# Altium PCB NIXIEclockhis.PcbDoc (part 1 of 3)
Units mil, origin at the board's own origin, x right, y up, seen from the top; angles counter-clockwise.
Board outline 8475 x 2960 mil, 2 copper layers (Top Layer, Bottom Layer); 232 components, 292 nets, 854 pads, 247 vias.
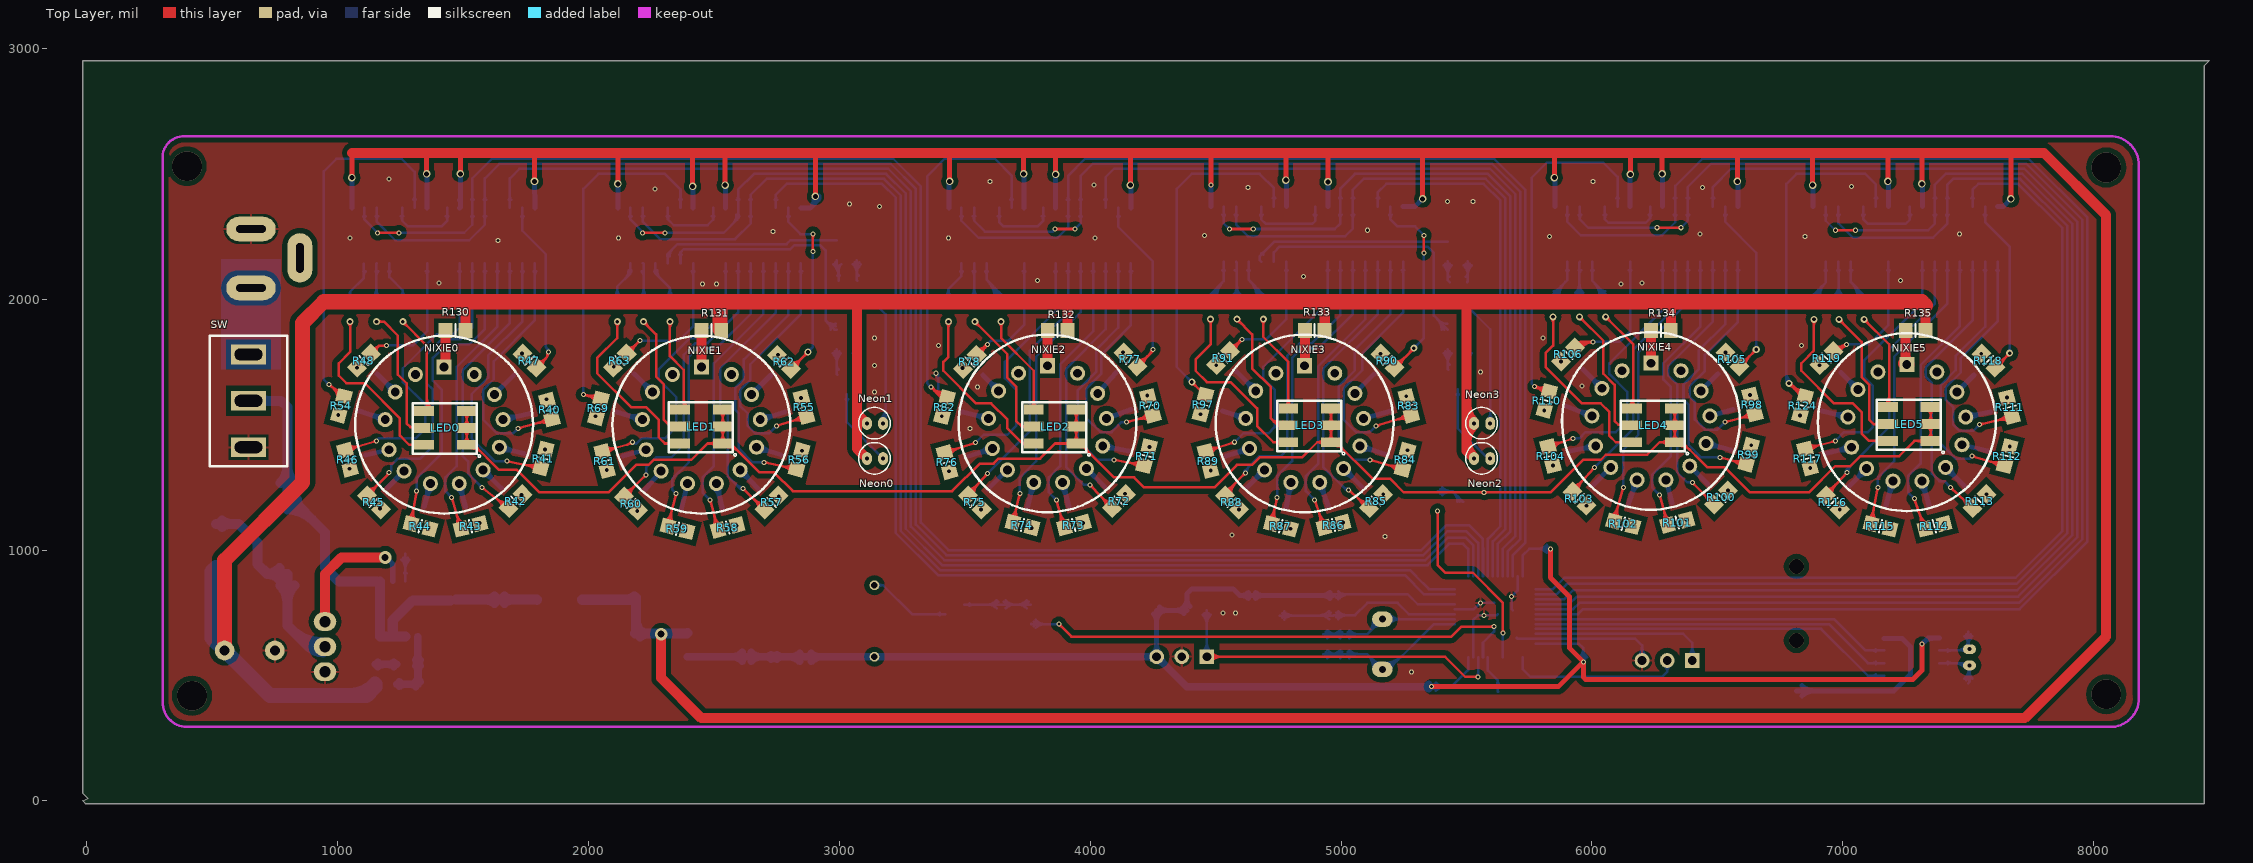
[diagram p0: Top Layer view]
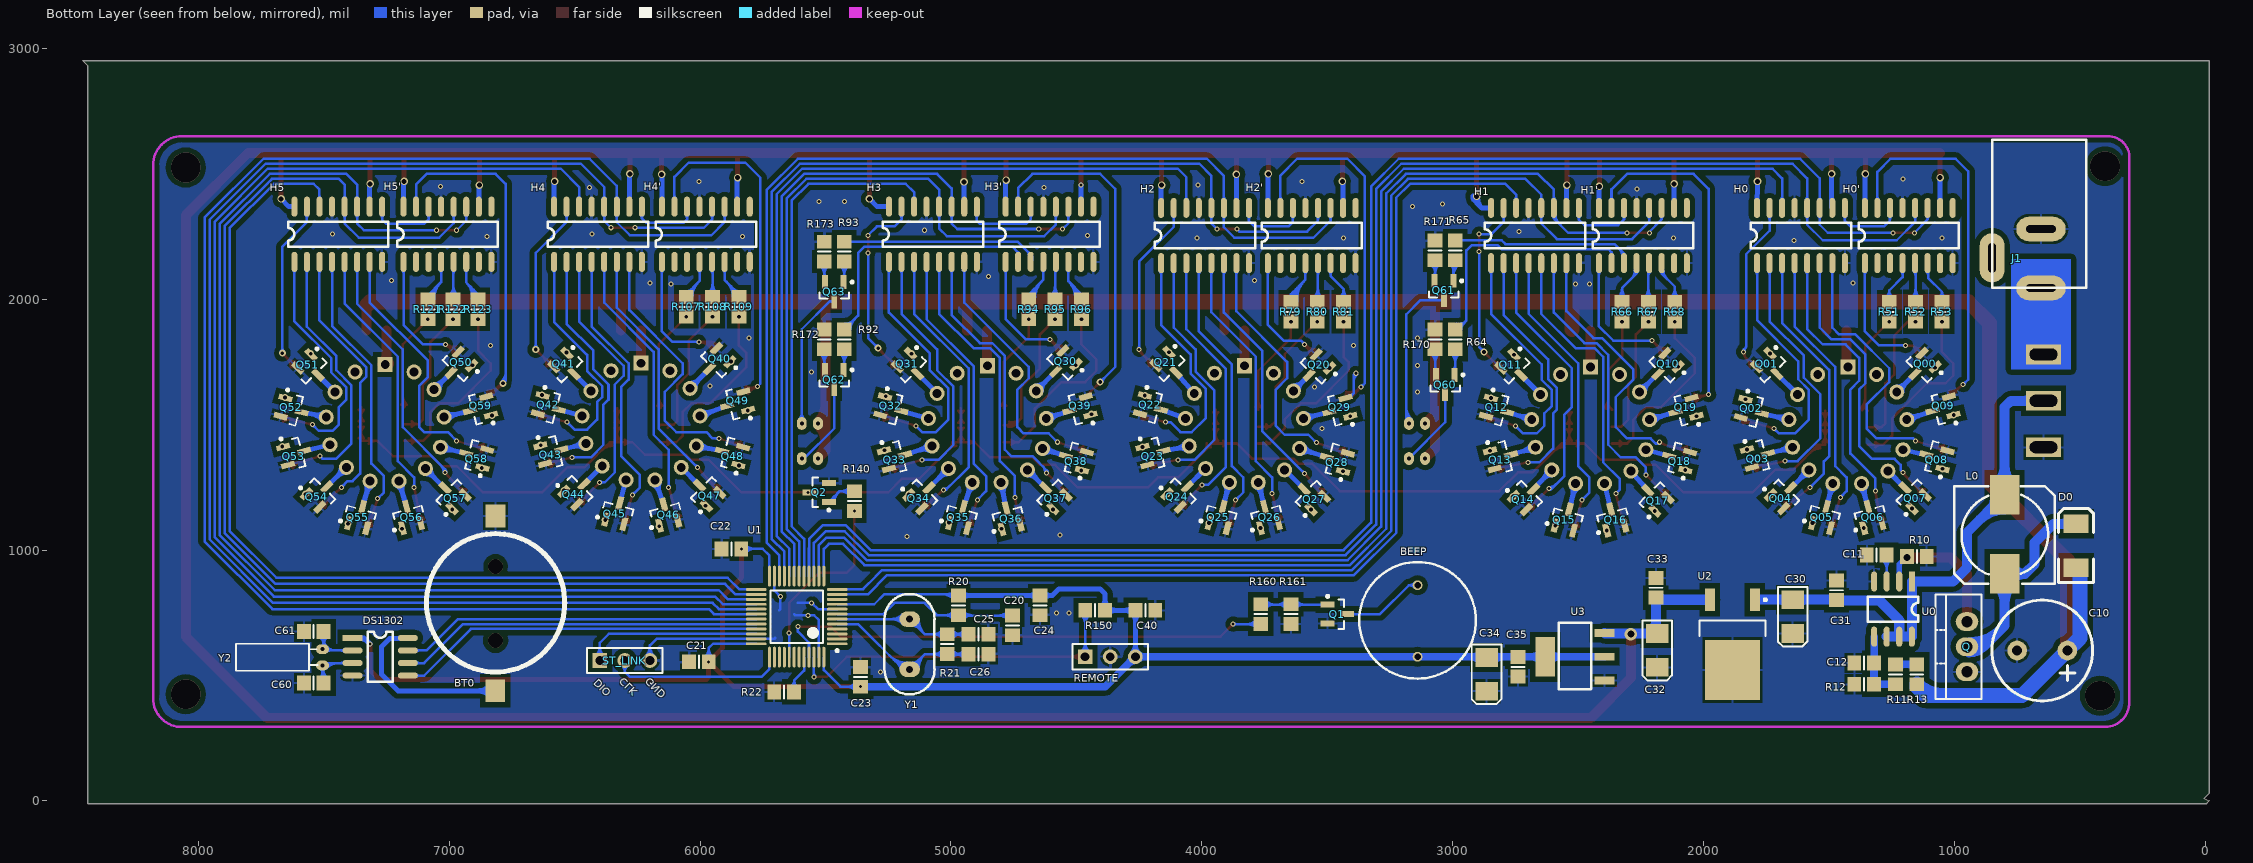
[diagram p1: Bottom Layer view, seen from below]

## Layer stack, top to bottom
Top Layer: signal copper 1.4
Dielectric: dielectric 12.6, FR-4, Dk 4.8
Bottom Layer: signal copper 1.4

## Board outline
-15,0 -5,-10 8440,-10 8440,2930 8460,2950 -15,2950 -15,30 -5,20 5,10

## Design rules (kind name [scope] priority, off if disabled: settings)
Clearance [All] p1: gap=7
ComponentClearance [All] p1: gap=0 collisioncheckmode=3 verticalgap=0 showdistances=FALSE
HoleSize [All] p1: absolutevalues=TRUE maxlimit=200 minlimit=1 maxpercent=80.000 minpercent=20.000
NetAntennae [All] p1: netantennaetolerance=10
PolygonConnect [All] p1: connectstyle=Relief reliefconductorwidth=10 reliefentries=4 polygonreliefangle="90 Angle" airgapwidth=10
RoutingVias [All] p1: holewidth=15 width=30 viastyle="Through Hole" minholewidth=10 minwidth=20 maxholewidth=28 maxwidth=50
SilkToSilkClearance [All] p1: silktosilkclearance=0
SilkToSolderMaskClearance [IsPad] p1: minsilkscreentomaskgap=0 clearancetoexposedcopper=TRUE
SolderMaskExpansion [All] p1: expansion=4
Width [All] p1: maxlimit=100 minlimit=10 preferedwidth=10
23 further rules are at their usual default settings.

## Components (designator, comment, footprint, x,y, rotation, side; value= is the part's Value field where it differs from the comment)
BEEP "Speaker" didi 3140,720 r90 bottom
BT0 "Battery" CR1220 6815,640 r90 bottom
C10 "250V" 1000UF 550,600 r0 bottom
C11 "Cap" 0805_M 1310,980 r0 bottom
C12 "Cap" 0805_M 1360,550 r180 bottom
C20 "Cap Semi" 0805_M 4755,700 r90 bottom
C21 "Cap Semi" 0805_M 6005,555 r180 bottom
C22 "Cap Semi" 0805_M 5875,1005 r180 bottom
C23 "Cap Semi" 0805_M 5360,495 r270 bottom
C24 "Cap Semi" 0805_M 4645,780 r90 bottom
C25 "CAP" 0805_M 4890,665 r0 bottom
C26 "CAP" 0805_M 4890,585 r0 bottom
C30 "Cap Pol1" 3528 1645,735 r270 bottom
C31 "104" 0805_M 1470,840 r270 bottom
C32 "Cap Pol1" 3528 2185,600 r270 bottom
C33 "Cap Semi" 0805_M 2190,850 r270 bottom
C34 "Cap Pol1" 3528 2865,505 r270 bottom
C35 "Cap Semi" 0805_M 2740,535 r90 bottom
C40 "Cap" 0805_M 4225,760 r0 bottom
C60 "Cap" 0805_M 7540,470 r0 bottom
C61 "Cap" 0805_M 7540,675 r0 bottom
D0 "SS14" 7227 515,930 r90 bottom
DS1302 "DS1302" SO-8 7385,650 r180 bottom
H0 "74HC595" SO-16 1615,2130 r90 bottom
H0' "74HC595" SO-16 1185,2130 r90 bottom
H1 "74HC595" SO-16 2675,2130 r90 bottom
H1' "74HC595" SO-16 2245,2130 r90 bottom
H2 "74HC595" SO-16 3990,2130 r90 bottom
H2' "74HC595" SO-16 3565,2130 r90 bottom
H3 "74HC595" SO-16 5075,2135 r90 bottom
H3' "74HC595" SO-16 4610,2135 r90 bottom
H4 "74HC595" SO-16 6410,2135 r90 bottom
H4' "74HC595" SO-16 5980,2135 r90 bottom
H5 "74HC595" SO-16 7445,2135 r90 bottom
H5' "74HC595" SO-16 7010,2135 r90 bottom
J1 "JK" POWER 475,2635 r0 bottom
L0 "L" L101 795,1055 r90 bottom
LED0 "LED.RGB" 5050LED 1335,1385 r0 top
LED1 "LED.RGB" 5050LED 2355,1390 r0 top
LED2 "LED.RGB" 5050LED 3765,1390 r0 top
LED3 "LED.RGB" 5050LED 4780,1395 r0 top
LED4 "LED.RGB" 5050LED 6150,1395 r0 top
LED5 "LED.RGB" 5050LED 7170,1400 r0 top
Neon0 "Neon" NEON 3110,1365 r270 top
Neon1 "Neon" NEON 3110,1505 r270 top
Neon2 "Neon" NEON 5530,1365 r270 top
Neon3 "Neon" NEON 5530,1505 r270 top
NIXIE0 "IN14" IN14 1425,1495 r0 top
NIXIE1 "IN14" IN14 2450,1495 r0 top
NIXIE2 "IN14" IN14 3830,1500 r0 top
NIXIE3 "IN14" IN14 4855,1500 r0 top
NIXIE4 "IN14" IN14 6235,1510 r0 top
NIXIE5 "IN14" IN14 7255,1505 r0 top
Q "IRF630" TO-220 950,615 r90 bottom
Q00 "A42" A42 1130,1730 r315 bottom
Q1 "QNPN" A42 3460,745 r180 bottom
Q01 "A42" A42 1735,1730 r225 bottom
Q2 "QNPN" A42 5525,1230 r0 bottom
Q02 "A42" A42 1805,1555 r195 bottom
Q03 "A42" A42 1780,1375 r165 bottom
Q04 "A42" A42 1680,1220 r135 bottom
Q05 "A42" A42 1520,1135 r105 bottom
Q06 "A42" A42 1335,1135 r75 bottom
Q07 "A42" A42 1170,1220 r45 bottom
Q08 "A42" A42 1075,1370 r15 bottom
Q09 "A42" A42 1050,1565 r345 bottom
Q10 "A42" A42 2155,1730 r315 bottom
Q11 "A42" A42 2755,1725 r225 bottom
Q12 "A42" A42 2820,1560 r195 bottom
Q13 "A42" A42 2805,1370 r165 bottom
Q14 "A42" A42 2705,1215 r135 bottom
Q15 "A42" A42 2545,1125 r105 bottom
Q16 "A42" A42 2360,1125 r75 bottom
Q17 "A42" A42 2195,1210 r45 bottom
Q18 "A42" A42 2100,1365 r15 bottom
Q19 "A42" A42 2075,1560 r345 bottom
Q20 "A42" A42 3545,1725 r315 bottom
Q21 "A42" A42 4130,1735 r225 bottom
Q22 "A42" A42 4200,1570 r195 bottom
Q23 "A42" A42 4190,1385 r165 bottom
Q24 "A42" A42 4085,1225 r135 bottom
Q25 "A42" A42 3925,1135 r105 bottom
Q26 "A42" A42 3740,1135 r75 bottom
Q27 "A42" A42 3565,1215 r45 bottom
Q28 "A42" A42 3465,1360 r15 bottom
Q29 "A42" A42 3455,1560 r345 bottom
Q30 "A42" A42 4555,1740 r315 bottom
Q31 "A42" A42 5160,1730 r225 bottom
Q32 "A42" A42 5235,1565 r195 bottom
Q33 "A42" A42 5220,1370 r165 bottom
Q34 "A42" A42 5115,1220 r135 bottom
Q35 "A42" A42 4960,1135 r105 bottom
Q36 "A42" A42 4770,1130 r75 bottom
Q37 "A42" A42 4595,1220 r45 bottom
Q38 "A42" A42 4505,1365 r15 bottom
Q39 "A42" A42 4490,1565 r345 bottom
Q40 "A42" A42 5935,1750 r315 bottom
Q41 "A42" A42 6530,1730 r225 bottom
Q42 "A42" A42 6600,1570 r195 bottom
Q43 "A42" A42 6590,1390 r165 bottom
Q44 "A42" A42 6490,1235 r135 bottom
Q45 "A42" A42 6330,1150 r105 bottom
Q46 "A42" A42 6135,1145 r75 bottom
Q47 "A42" A42 5975,1230 r45 bottom
Q48 "A42" A42 5875,1385 r15 bottom
Q49 "A42" A42 5855,1585 r345 bottom
Q50 "A42" A42 6965,1735 r315 bottom
Q51 "A42" A42 7550,1725 r225 bottom
Q52 "A42" A42 7625,1560 r195 bottom
Q53 "A42" A42 7615,1385 r165 bottom
Q54 "A42" A42 7515,1225 r135 bottom
Q55 "A42" A42 7355,1135 r105 bottom
Q56 "A42" A42 7160,1135 r75 bottom
Q57 "A42" A42 6990,1220 r45 bottom
Q58 "A42" A42 6895,1375 r15 bottom
Q59 "A42" A42 6880,1565 r345 bottom
Q60 "A42" A42 3030,1660 r270 bottom
Q61 "A42" A42 3035,2035 r270 bottom
Q62 "A42" A42 5465,1680 r270 bottom
Q63 "A42" A42 5465,2030 r270 bottom
R10 "Res1" 0805_M 1150,975 r0 bottom
R11 "Res1" 0805_M 1235,505 r90 bottom
R12 "2K" 0805_M 1360,465 r180 bottom
R13 "Res1" 0805_M 1150,505 r270 bottom
R20 "Res2" 0805_M 4970,780 r270 bottom
R21 "RES" 0805_M 5015,625 r90 bottom
R22 "Res2" 0805_M 5665,435 r0 bottom
R40 "Res1" 0805_M 1845,1560 r105 top
R41 "Res1" 0805_M 1820,1365 r75 top
R42 "Res1" 0805_M 1710,1195 r45 top
R43 "Res1" 0805_M 1530,1095 r15 top
R44 "Res1" 0805_M 1330,1095 r345 top
R45 "Res1" 0805_M 1145,1190 r315 top
R46 "Res1" 0805_M 1040,1360 r285 top
R47 "Res1" 0805_M 1765,1755 r315 top
R48 "Res1" 0805_M 1105,1755 r225 top
R51 "Res1" 0805_M 1260,1950 r270 bottom
R52 "Res1" 0805_M 1155,1950 r270 bottom
R53 "Res1" 0805_M 1050,1950 r270 bottom
R54 "Res1" 0805_M 1015,1575 r75 top
R55 "Res1" 0805_M 2860,1570 r105 top
R56 "Res1" 0805_M 2840,1360 r75 top
R57 "Res1" 0805_M 2730,1190 r45 top
R58 "Res1" 0805_M 2555,1090 r15 top
R59 "Res1" 0805_M 2355,1085 r345 top
R60 "Res1" 0805_M 2170,1185 r315 top
R61 "Res1" 0805_M 2065,1355 r285 top
R62 "Res1" 0805_M 2780,1750 r315 top
R63 "Res1" 0805_M 2125,1755 r225 top
R64 "Res1" 0805_M 2990,1840 r270 bottom
R65 "Res1" 0805_M 2990,2195 r270 bottom
R66 "Res1" 0805_M 2325,1950 r270 bottom
R67 "Res1" 0805_M 2220,1950 r270 bottom
R68 "Res1" 0805_M 2115,1950 r270 bottom
R69 "Res1" 0805_M 2040,1565 r75 top
R70 "Res1" 0805_M 4240,1575 r105 top
R71 "Res1" 0805_M 4225,1375 r75 top
R72 "Res1" 0805_M 4115,1195 r45 top
R73 "Res1" 0805_M 3935,1100 r15 top
R74 "Res1" 0805_M 3730,1100 r345 top
R75 "Res1" 0805_M 3540,1190 r315 top
R76 "Res1" 0805_M 3430,1350 r285 top
R77 "Res1" 0805_M 4160,1760 r315 top
R78 "Res1" 0805_M 3520,1750 r225 top
R79 "Res1" 0805_M 3645,1950 r270 bottom
R80 "Res1" 0805_M 3540,1950 r270 bottom
R81 "Res1" 0805_M 3435,1950 r270 bottom
R82 "Res1" 0805_M 3420,1570 r75 top
R83 "Res1" 0805_M 5270,1575 r105 top
R84 "Res1" 0805_M 5255,1360 r75 top
R85 "Res1" 0805_M 5140,1195 r45 top
R86 "Res1" 0805_M 4970,1100 r15 top
R87 "Res1" 0805_M 4760,1095 r345 top
R88 "Res1" 0805_M 4565,1190 r315 top
R89 "Res1" 0805_M 4470,1355 r285 top
R90 "Res1" 0805_M 5185,1755 r315 top
R91 "Res1" 0805_M 4530,1765 r225 top
R92 "Res1" 0805_M 5425,1840 r270 bottom
R93 "Res1" 0805_M 5425,2190 r270 bottom
R94 "Res1" 0805_M 4690,1960 r270 bottom
R95 "Res1" 0805_M 4585,1960 r270 bottom
R96 "Res1" 0805_M 4480,1960 r270 bottom
R97 "Res1" 0805_M 4450,1580 r75 top
R98 "Res1" 0805_M 6640,1580 r105 top
R99 "Res1" 0805_M 6625,1380 r75 top
R100 "Res1" 0805_M 6515,1210 r45 top
R101 "Res1" 0805_M 6340,1110 r15 top
R102 "Res1" 0805_M 6125,1105 r345 top
R103 "Res1" 0805_M 5950,1205 r315 top
R104 "Res1" 0805_M 5835,1375 r285 top
R105 "Res1" 0805_M 6560,1760 r315 top
R106 "Res1" 0805_M 5905,1780 r225 top
R107 "Res1" 0805_M 6055,1970 r270 bottom
R108 "Res1" 0805_M 5950,1970 r270 bottom
R109 "Res1" 0805_M 5845,1970 r270 bottom
R110 "Res1" 0805_M 5820,1595 r75 top
R111 "Res1" 0805_M 7665,1570 r105 top
R112 "Res1" 0805_M 7655,1375 r75 top
R113 "Res1" 0805_M 7545,1195 r45 top
R114 "Res1" 0805_M 7365,1095 r15 top
R115 "Res1" 0805_M 7150,1095 r345 top
R116 "Res1" 0805_M 6960,1190 r315 top
R117 "Res1" 0805_M 6860,1365 r285 top
R118 "Res1" 0805_M 7580,1755 r315 top
R119 "Res1" 0805_M 6935,1765 r225 top
R121 "Res1" 0805_M 7085,1960 r270 bottom
R122 "Res1" 0805_M 6985,1960 r270 bottom
R123 "Res1" 0805_M 6885,1960 r270 bottom
R124 "Res1" 0805_M 6840,1575 r75 top
R130 "Res1" 0805_M 1470,1875 r0 top
R131 "Res1" 0805_M 2490,1875 r0 top
R132 "Res1" 0805_M 3870,1875 r0 top
R133 "Res1" 0805_M 4895,1875 r0 top
R134 "Res1" 0805_M 6275,1875 r0 top
R135 "Res1" 0805_M 7290,1875 r0 top
R140 "Res1" 0805_M 5385,1195 r270 bottom
R150 "Res1" 0805_M 4425,760 r0 bottom
R160 "Res2" 0805_M 3765,745 r90 bottom
R161 "Res2" 0805_M 3645,745 r90 bottom
R170 "Res1" 0805_M 3070,1840 r90 bottom
R171 "Res1" 0805_M 3070,2195 r90 bottom
R172 "Res1" 0805_M 5505,1840 r90 bottom
R173 "Res1" 0805_M 5505,2190 r90 bottom
REMOTE "REMOTE" HDR1X3 4465,575 r180 bottom
ST_LINK "ST_LINK" HDR1X3 6400,560 r180 bottom
SW "SW-SPDT" SW 800,1335 r90 top
U0 "MC34063" SO-8 1170,875 r270 bottom
U1 "STM32F100C8T6BTR" LQFP48_M 5615,735 r0 bottom
U2 "78L05_1" "78M05 DPAK TO-225" 1885,625 r270 bottom
U3 "LM1117-3.3V" 1117 2395,480 r90 bottom
Y1 "8M" XTAL 5165,625 r270 bottom
Y2 "XTAL" X32768 7505,605 r0 bottom

## Footprints (in the part's own frame and the unit in brackets; to place one, negate y for a bottom-side part, rotate by r counter-clockwise, add the part's x,y. Pads: shape width x height; smd on the part's side, far side on the other; paste and mask are expansions set on the pad)
"78M05 DPAK TO-225" [mm] "D-PAK, 3-Pads, Body 6.20x6.72mm (max), IPC Medium Density"
  rect 2.3x1 smd: 1(-4.5,-2.28) 3(-4.5,2.28)
  rect 6.1x5.55 smd: 2(2.6,0)
  silkscreen extent -4.62,-3.35 -0.85,3.45, body extent -2.4,-3.35 3.8,3.35, height 2.38
0805_M [mm] "Chip Resistor, Body 2.0x1.2mm, IPC Low Density"
  rect 1.4x1.5 smd: 1(-1,0) 2(1,0)
  silkscreen extent 0,-0.65 0,0.65, body extent -1.07,-0.7 1.07,0.7, height 0.7
1000UF [mm]
  round 2 hole 1: 1(0,0) 2(5.08,0)
  silkscreen extent -2.56,-5.1 7.64,5.1
1117 [mm]
  rect 0.8x2 smd: 1(0.009,-0.004) 2(2.409,-0.004) 3(4.809,-0.004)
  rect 4x2 smd: 4(2.409,5.996)
  silkscreen extent -0.89,1.35 5.86,4.65
3528 [mm]
  rect 1.9x2.28 smd: 1(-1.71,0) 2(1.71,0)
  silkscreen extent -3.02,-1.5 3.02,1.5
5050LED [mil]
  rect 78.74x39.37 smd: 1(10,170) 2(10,102.5) 3(10,35) 4(180,35) 5(180,102.5) 6(180,170)
  silkscreen extent -35,-15 235,200
7227 [mil]
  rect 75x100 smd: 1(175,0) 2(0,0)
  silkscreen extent -60,-70 235,70
A42 [mm] "SOT23, 3-Leads, Body 2.90x2.40mm, Pitch 0.95mm, IPC Medium Density"
  rect 1.4x0.6 smd: 1(0.975,0) 2(-0.975,0.95) 3(-0.975,-0.95)
  silkscreen extent -1.1,-1.5 0.7,1.92, body extent -0.7,-1.5 0.7,1.5, height 1.15
CR1220 [mm]
  rect 2.3x2 smd: 1(-5.1,0.025) 2(12.6,0)
  silkscreen extent -3.19,-7 10.81,7
didi [mm]
  round 1 hole 0.65: 1(-3.683,0) 2(3.556,0)
  silkscreen extent -5.9,-5.9 5.9,5.9
HDR1X3 [mm] "Connector; Header; 3 Position"
  rect 1.5x1.5 hole 0.9: 1(0,0)
  round 1.5 hole 0.9: 2(2.54,0) 3(5.08,0)
  silkscreen extent -1.27,-1.27 6.35,1.27
IN14 [mil]
  rect 60x60 hole 35.43: a(0,235)
  round 60 hole 35.43: b(120,205) c(200,125) d(235,25) e(220,-85) f(155,-175) g(60,-230) h(-55,-230) i(-160,-180) j(-220,-95) k(-235,25) l(-195,135) m(-115,205)
  silkscreen extent -354,-349 354,359
L101 [mm]
  rect 4x3 smd: 1(-3.797,0.124) 2(4.203,0.124)
  silkscreen extent -4.83,-4.95 5.08,5.21
LQFP48_M [mm] "Thin QFP, 48-Leads, Body 7x7mm, Pitch 0.5mm, IPC Low Density"
  oval 2.1x0.3 smd: 1(-4.1,2.75) 2(-4.1,2.25) 3(-4.1,1.75) 4(-4.1,1.25) 5(-4.1,0.75) 6(-4.1,0.25) 7(-4.1,-0.25) 8(-4.1,-0.75) 9(-4.1,-1.25) 10(-4.1,-1.75) 11(-4.1,-2.25) 12(-4.1,-2.75) 25(4.1,-2.75) 26(4.1,-2.25) 27(4.1,-1.75) 28(4.1,-1.25) 29(4.1,-0.75) 30(4.1,-0.25) 31(4.1,0.25) 32(4.1,0.75) 33(4.1,1.25) 34(4.1,1.75) 35(4.1,2.25) 36(4.1,2.75)
  oval 0.3x2.1 smd: 13(-2.75,-4.1) 14(-2.25,-4.1) 15(-1.75,-4.1) 16(-1.25,-4.1) 17(-0.75,-4.1) 18(-0.25,-4.1) 19(0.25,-4.1) 20(0.75,-4.1) 21(1.25,-4.1) 22(1.75,-4.1) 23(2.25,-4.1) 24(2.75,-4.1) 37(2.75,4.1) 38(2.25,4.1) 39(1.75,4.1) 40(1.25,4.1) 41(0.75,4.1) 42(0.25,4.1) 43(-0.25,4.1) 44(-0.75,4.1) 45(-1.25,4.1) 46(-1.75,4.1) 47(-2.25,4.1) 48(-2.75,4.1)
  silkscreen extent -4.22,-2.65 2.65,3.57, body extent -3.5,-3.5 3.5,3.5, height 1.6
NEON [mm]
  oval 1.3x1 hole 0.4: 1(0,0) 2(0,1.64)
  silkscreen extent -1.62,-0.84 1.57,2.36
POWER [mil]
  oval 196.85x98.43 hole 30 slot 118.11 at 0 deg: 1(180,590) 2(180,355)
  oval 98.43x196.85 hole 30 slot 118.11 at 90 deg: 3(375,470)
  silkscreen extent 0,0 375,590
SO-8 [mil]
  rect 80x24 smd: 1(0,0)
  oval 80x24 smd: 2(0,-50) 3(0,-100) 4(0,-150) 5(220,-150) 6(220,-100) 7(220,-50) 8(220,0)
  silkscreen extent 60,-175 160,25
SO-16 [mil]
  oval 80x24 smd: 1(14,172) 2(14,122) 3(14,72) 4(14,22) 5(14,-28) 6(14,-78) 7(14,-128) 8(14,-178) 9(234,-178) 10(234,-128) 11(234,-78) 12(234,-28) 13(234,22) 14(234,72) 15(234,122) 16(234,172)
  silkscreen extent 74,-203 174,197
SW [mm]
  rect 2x3.5 hole 1.2 slot 2.8 at 90 deg: 1(1.905,3.937) 2(6.604,3.937) 3(11.303,3.937)
  silkscreen extent 0,0 13.21,7.87
TO-220 [mil]
  oval 75x90 hole 45: 1(-100,0) 2(0,0) 3(100,0)
  silkscreen extent -208,-58 208,125
X32768 [mm]
  oval 1.3x1 hole 0.4: 1(0,0) 2(0,1.64)
  silkscreen extent 0.51,-0.56 8.77,2.17
XTAL [mil]
  oval 62x82 hole 28: 1(-100,0) 2(100,0)
  silkscreen extent -200,-100 200,100

## Part data
BEEP: "Loudspeaker"
BT0: "Multicell Battery"
C10: library part "Cap Pol1", "Polarized Capacitor (Radial)"
C11 C12 C40 C60 C61: "Capacitor"
C20 C21 C22 C23 C24 C33 C35: "Capacitor (Semiconductor SIM Model)"
C30 C32 C34: "Polarized Capacitor (Radial)"
C31: library part CAP, "Capacitor"
D0: library part "Diode 18TQ045", "Schottky Rectifier"
DS1302: library part Component_3
L0: library part "Inductor Iron", "Magnetic-Core Inductor"
Neon0 Neon1 Neon2 Neon3: "Neon Bulb"
Q: library part MOSFET-N, "N-Channel MOSFET"
Q00 Q01 Q02 Q03 Q04 Q05 Q06 Q07 Q08 Q09 Q10 Q11 Q12 Q13 Q14 Q15 Q16 Q17 Q18 Q19 Q20 Q21 Q22 Q23 Q24 Q25 Q26 Q27 Q28 Q29 Q30 Q31 Q32 Q33 Q34 Q35 Q36 Q37 Q38 Q39 Q40 Q41 Q42 Q43 Q44 Q45 Q46 Q47 Q48 Q49 Q50 Q51 Q52 Q53 Q54 Q55 Q56 Q57 Q58 Q59 Q60 Q61 Q62 Q63: library part QNPN, "NPN Bipolar Transistor"
Q1 Q2: "NPN Bipolar Transistor"
R10 R11 R13 R20 R22 R40 R41 R42 R43 R44 R45 R46 R47 R48 R51 R52 R53 R54 R55 R56 R57 R58 R59 R60 R61 R62 R63 R64 R65 R66 R67 R68 R69 R70 R71 R72 R73 R74 R75 R76 R77 R78 R79 R80 R81 R82 R83 R84 R85 R86 R87 R88 R89 R90 R91 R92 R93 R94 R95 R96 R97 R98 R99 R100 R101 R102 R103 R104 R105 R106 R107 R108 R109 R110 R111 R112 R113 R114 R115 R116 R117 R118 R119 R121 R122 R123 R124 R130 R131 R132 R133 R134 R135 R140 R150 R160 R161 R170 R171 R172 R173: "Resistor"
R12: library part Res1, "Resistor"
SW: "SPDT Subminiature Toggle Switch, Right Angle Mounting, Vertical Actuation"
U1: "STM32 ARM-based 32-bit MCU Value Line with 64 kB Flash, 8 kB Internal RAM, Internal Code B, -40 to +85癈 Temperature, 48-Pin LQFP, Tape and Reel"
U3: library part 1117-5.0
Y1: library part XTAL, "Crystal Oscillator"
Y2: "Crystal Oscillator"

## Via types
v1: diameter 20, hole 12, Top Layer to Bottom Layer, 132 vias
v2: diameter 28, hole 15, Top Layer to Bottom Layer, 84 vias
v3: diameter 30, hole 20, Top Layer to Bottom Layer, 23 vias
v4: diameter 118.11, hole 118.11, Top Layer to Bottom Layer, 4 vias
v5: diameter 50, hole 28, Top Layer to Bottom Layer, 2 vias
v6: diameter 59.06, hole 59.06, Top Layer to Bottom Layer, 2 vias

## Nets (pads, with @x,y where several pads share a name; then routed paths per layer and width w, separated by ;. In a path a pad name is that pad's centre, name@x,y a point inside that pad or via, vN(x,y) a via of type N, cw(c..) or ccw(c..) an arc to the next point about the centre after c; other vN are vias at no path point)
595.DATA0: H0.14 U1.14 | length 5601.9
  Bottom Layer w10: H0.14@1682.05,2396.95 ccw(c1670.1,2408.9) 1687,2408.9 ccw(c1703.9,2408.9) H0.14@1691.95,2396.95 ; H0.14@1687,2364 1687,2482 1725,2520 3195,2520 3285,2430 3285,1093.43 3418.43,960 5336.57,960 5426.57,1050 5496.1,1050 5526.42,1019.69 U1.14@5526.42,896.42
595.DATA1: H1.14 U1.11 | length 4264.7
  Bottom Layer w10: H1.14@2742.05,2396.95 ccw(c2730.1,2408.9) 2747,2408.9 ccw(c2763.9,2408.9) H1.14@2751.95,2396.95 ; H1.14@2747,2364 2747,2417 2790,2460 3170.15,2460 3225,2405.15 3225,1068.58 3393.58,900 5255,900 5331.42,823.58 U1.11@5453.58,823.58
595.DATA2: H2.14 U1.20 | length 3381.7
  Bottom Layer w10: H2.14@4057.05,2396.95 ccw(c4045.1,2408.9) 4062,2408.9 ccw(c4078.9,2408.9) H2.14@4066.95,2396.95 ; H2.14@4062,2364 4062,2487 4095,2520 5593.43,2520 5695,2418.43 5695,1056.57 5643.9,1005.47 5644.53,1004.84 U1.20@5644.53,896.42
595.DATA3: H3.14 U1.17 | length 2131.6
  Bottom Layer w10: H3.14@5142.05,2401.95 ccw(c5130.1,2413.9) 5147,2413.9 ccw(c5163.9,2413.9) H3.14@5151.95,2401.95 ; H3.14@5147,2369 5147,2427 5180,2460 5568.58,2460 5635,2393.58 5635,1095 5585,1045 ; U1.17@5585.47,896.42 5585.47,1045
595.DATA4: H4.14 U1.28 | length 5201.6
  Bottom Layer w10: U1.28@5776.42,784.21 5909.21,784.21 5940,815 7698.43,815 7935,1051.57 7935,2308.43 7723.43,2520 6555,2520 6482,2447 H4.14@6482,2369 ; H4.14@6477.05,2401.95 ccw(c6465.1,2413.9) 6482,2413.9 ccw(c6498.9,2413.9) H4.14@6486.95,2401.95
595.DATA5: H5.14 U1.25 | length 3937.5
  Bottom Layer w10: U1.25@5776.42,843.27 5843.27,843.27 5890,890 7688.58,890 7875,1076.42 7875,2283.58 7698.58,2460 7540,2460 7517,2437 H5.14@7517,2369 ; H5.14@7512.05,2401.95 ccw(c7500.1,2413.9) 7517,2413.9 ccw(c7533.9,2413.9) H5.14@7521.95,2401.95
595.SHCP0: H0'.11 H0.11 U1.16 | length 6520.6
  Top Layer w10: v1(1160,2265) v1(1245,2265) ; v1@1163.54,2261.46 cw(c1172.07,2252.93) 1172.07,2265 cw(c1172.07,2277.07) v1@1163.54,2268.54 ; v1@1241.46,2261.46 ccw(c1232.93,2252.93) 1232.93,2265 ccw(c1232.93,2277.07) v1@1241.46,2268.54
  Bottom Layer w10: H0'.11@1102.05,2331.05 cw(c1090.1,2319.1) 1107,2319.1 cw(c1123.9,2319.1) H0'.11@1111.95,2331.05 ; H0'.11@1107,2364 1107,2318 v1(1160,2265) ; v1(1245,2265) 1505,2265 1537,2297 H0.11@1537,2364 1537,2482 1615,2560 3215,2560 3325,2450 3325,1110 3435,1000 5320,1000 5420,1100 5510,1100 5565.47,1044.53 5565.47,1007.33 ; H0.11@1532.05,2331.05 cw(c1520.1,2319.1) 1537,2319.1 cw(c1553.9,2319.1) H0.11@1541.95,2331.05 ; H0.11@1532.05,2396.95 ccw(c1520.1,2408.9) 1537,2408.9 ccw(c1553.9,2408.9) H0.11@1541.95,2396.95 ; 5565.47,1005 5565.47,1007.33 ; U1.16@5565.79,896.42 5565.79,1007.01 5565.47,1007.33
595.SHCP1: H1'.11 H1.11 U1.13 | length 5334.6
  Top Layer w10: v1(2215,2265) v1(2305,2265) ; v1@2218.54,2261.46 cw(c2227.07,2252.93) 2227.07,2265 cw(c2227.07,2277.07) v1@2218.54,2268.54 ; v1@2301.46,2261.46 ccw(c2292.93,2252.93) 2292.93,2265 ccw(c2292.93,2277.07) v1@2301.46,2268.54
  Bottom Layer w10: H1'.11@2162.05,2331.05 cw(c2150.1,2319.1) 2167,2319.1 cw(c2183.9,2319.1) H1'.11@2171.95,2331.05 ; H1'.11@2167,2364 2167,2318 2220,2265 v1(2215,2265) ; v1(2305,2265) 2540,2265 2597,2322 ; 2575.15,2300.15 ccw(c2539.3,2336) H1.11@2590,2336 ; H1.11@2592.05,2396.95 ccw(c2580.1,2408.9) 2597,2408.9 ccw(c2613.9,2408.9) H1.11@2601.95,2396.95 ; 2592.22,2317.22 ccw(c2573.44,2336) H1.11@2600,2336 ; H1.11@2592.8,2330.4 cw(c2586.5,2322) 2597,2322 ; H1.11@2601.2,2330.4 ccw(c2607.5,2322) 2597,2322 ; U1.13@5506.73,896.42 5506.73,1004.68 5486.42,1025 5430,1025 5345,940 3410.15,940 3265,1085.15 3265,2421.72 3186.72,2500 2660,2500 2597,2437 H1.11@2597,2364 2597,2322
595.SHCP2: H2'.11 H2.11 U1.22 | length 4268.9
  Bottom Layer w10: H2'.11@3482.05,2331.05 cw(c3470.1,2319.1) 3487,2319.1 cw(c3503.9,2319.1) H2'.11@3491.95,2331.05 ; H2'.11@3487,2364 3487,2313 3555,2245 3870,2245 3912,2287 H2.11@3912,2364 3912,2492 3980,2560 5610,2560 5735,2435 5735,1030 5683.9,978.9 U1.22@5683.9,896.42 ; H2.11@3907.05,2331.05 cw(c3895.1,2319.1) 3912,2319.1 cw(c3928.9,2319.1) H2.11@3916.95,2331.05 ; H2.11@3907.05,2396.95 ccw(c3895.1,2408.9) 3912,2408.9 ccw(c3928.9,2408.9) H2.11@3916.95,2396.95
595.SHCP3: H3'.11 H3.11 U1.19 | length 3081.7
  Top Layer w10: v1(4555,2280) v1(4650,2280) ; v1@4558.54,2276.46 cw(c4567.07,2267.93) 4567.07,2280 cw(c4567.07,2292.07) v1@4558.54,2283.54 ; v1@4646.46,2276.46 ccw(c4637.93,2267.93) 4637.93,2280 ccw(c4637.93,2292.07) v1@4646.46,2283.54
  Bottom Layer w10: H3'.11@4527.05,2336.05 cw(c4515.1,2324.1) 4532,2324.1 cw(c4548.9,2324.1) H3'.11@4536.95,2336.05 ; H3'.11@4532,2369 4532,2303 v1(4555,2280) ; v1(4650,2280) 4975,2280 4997,2302 H3.11@4997,2369 4997,2442 5055,2500 5585.15,2500 5675,2410.15 5675,1075 5623.9,1023.9 5624.84,1022.95 U1.19@5624.84,896.42 ; H3.11@4992.05,2336.05 cw(c4980.1,2324.1) 4997,2324.1 cw(c5013.9,2324.1) H3.11@5001.95,2336.05 ; H3.11@4992.05,2401.95 ccw(c4980.1,2413.9) 4997,2413.9 ccw(c5013.9,2413.9) H3.11@5001.95,2401.95
595.SHCP4: H4'.11 H4.11 U1.30 | length 6153
  Bottom Layer w10: U1.30@5776.42,744.84 5944.84,744.84 5965,765 7705,765 7975,1035 7975,2325 7740,2560 6440,2560 6332,2452 H4.11@6332,2369 6332,2307 6280,2255 5955,2255 5902,2308 H4'.11@5902,2369 ; H4'.11@5897.05,2336.05 cw(c5885.1,2324.1) 5902,2324.1 cw(c5918.9,2324.1) H4'.11@5906.95,2336.05 ; H4.11@6327.05,2336.05 cw(c6315.1,2324.1) 6332,2324.1 cw(c6348.9,2324.1) H4.11@6336.95,2336.05 ; H4.11@6327.05,2401.95 ccw(c6315.1,2413.9) 6332,2413.9 ccw(c6348.9,2413.9) H4.11@6336.95,2401.95
595.SHCP5: H5'.11 H5.11 U1.27 | length 4924
  Top Layer w10: v1(6970,2275) v1(7050,2275) ; v1@6973.54,2271.46 cw(c6982.07,2262.93) 6982.07,2275 cw(c6982.07,2287.07) v1@6973.54,2278.54 ; v1@7046.46,2271.46 ccw(c7037.93,2262.93) 7037.93,2275 ccw(c7037.93,2287.07) v1@7046.46,2278.54
  Bottom Layer w10: U1.27@5776.42,803.9 5888.9,803.9 5925,840 7695.15,840 7915,1059.85 7915,2300.15 7715.15,2500 7410,2500 7367,2457 H5.11@7367,2369 7367,2302 7340,2275 v1(7050,2275) ; H5'.11@6927.05,2336.05 cw(c6915.1,2324.1) 6932,2324.1 cw(c6948.9,2324.1) H5'.11@6936.95,2336.05 ; H5'.11@6932,2369 6932,2313 v1(6970,2275) ; H5.11@7362.05,2336.05 cw(c7350.1,2324.1) 7367,2324.1 cw(c7383.9,2324.1) H5.11@7371.95,2336.05 ; H5.11@7362.05,2401.95 ccw(c7350.1,2413.9) 7367,2413.9 ccw(c7383.9,2413.9) H5.11@7371.95,2401.95
595.STCP0: H0'.12 H0.12 U1.15 | length 6410.7
  Bottom Layer w10: H0'.12@1152.05,2331.05 cw(c1140.1,2319.1) 1157,2319.1 cw(c1173.9,2319.1) H0'.12@1161.95,2331.05 ; H0'.12@1157,2364 1157,2308 1230,2235 1525,2235 1587,2297 H0.12@1587,2364 1587,2482 1645,2540 3205,2540 3305,2440 3305,1101.72 3426.72,980 5328.28,980 5423.28,1075 5500,1075 5546.1,1028.9 U1.15@5546.1,896.42 ; H0.12@1582.05,2331.05 cw(c1570.1,2319.1) 1587,2319.1 cw(c1603.9,2319.1) H0.12@1591.95,2331.05 ; H0.12@1582.05,2396.95 ccw(c1570.1,2408.9) 1587,2408.9 ccw(c1603.9,2408.9) H0.12@1591.95,2396.95
595.STCP1: H1'.12 H1.12 U1.12 | length 5024.5
  Bottom Layer w10: H1'.12@2212.05,2331.05 cw(c2200.1,2319.1) 2217,2319.1 cw(c2233.9,2319.1) H1'.12@2221.95,2331.05 ; H1'.12@2217,2364 2217,2308 2285,2240 2585,2240 2647,2302 H1.12@2647,2364 2647,2417 2710,2480 3178.43,2480 3245,2413.43 3245,1076.86 3401.86,920 5275,920 5327.5,867.5 ; H1.12@2642.05,2331.05 cw(c2630.1,2319.1) 2647,2319.1 cw(c2663.9,2319.1) H1.12@2651.95,2331.05 ; H1.12@2642.05,2396.95 ccw(c2630.1,2408.9) 2647,2408.9 ccw(c2663.9,2408.9) H1.12@2651.95,2396.95 ; 5330,865 5350,845 5451.85,845 U1.12@5453.58,843.27
595.STCP2: H2'.12 H2.12 U1.21 | length 4188.9
  Top Layer w10: v1(3860,2280) v1(3940,2280) ; v1@3863.54,2276.46 cw(c3872.07,2267.93) 3872.07,2280 cw(c3872.07,2292.07) v1@3863.54,2283.54 ; v1@3936.46,2276.46 ccw(c3927.93,2267.93) 3927.93,2280 ccw(c3927.93,2292.07) v1@3936.46,2283.54
  Bottom Layer w10: H2'.12@3532.05,2331.05 cw(c3520.1,2319.1) 3537,2319.1 cw(c3553.9,2319.1) H2'.12@3541.95,2331.05 ; H2'.12@3537,2364 3537,2313 3580,2270 3850,2270 v1(3860,2280) ; v1(3940,2280) 3962,2302 H2.12@3962,2364 ; H2.12@3957.05,2331.05 cw(c3945.1,2319.1) 3962,2319.1 cw(c3978.9,2319.1) H2.12@3966.95,2331.05 ; H2.12@3957.05,2396.95 ccw(c3945.1,2408.9) 3962,2408.9 ccw(c3978.9,2408.9) H2.12@3966.95,2396.95 ; H2.12@3960,2362 H2.12@3962,2364 ; U1.21@5664.21,896.42 5664.21,993.58 5663.9,993.9 5715,1045 5715,2426.72 5601.72,2540 4010,2540 3962,2492 H2.12@3962,2364
595.STCP3: H3'.12 H3.12 U1.18 | length 2987.2
  Bottom Layer w10: H3'.12@4577.05,2336.05 cw(c4565.1,2324.1) 4582,2324.1 cw(c4598.9,2324.1) H3'.12@4586.95,2336.05 ; H3'.12@4582,2369 4582,2298 4629,2251 5016,2251 5047,2282 H3.12@5047,2369 5047,2437 5090,2480 5576.86,2480 5655,2401.86 5655,1085 5605.16,1035.16 U1.18@5605.16,896.42 ; H3.12@5042.05,2336.05 cw(c5030.1,2324.1) 5047,2324.1 cw(c5063.9,2324.1) H3.12@5051.95,2336.05 ; H3.12@5042.05,2401.95 ccw(c5030.1,2413.9) 5047,2413.9 ccw(c5063.9,2413.9) H3.12@5051.95,2401.95
595.STCP4: H4'.12 H4.12 U1.29 | length 6029.9
  Top Layer w10: v1(6260,2285) v1(6355,2285) ; v1@6263.54,2281.46 cw(c6272.07,2272.93) 6272.07,2285 cw(c6272.07,2297.07) v1@6263.54,2288.54 ; v1@6351.46,2281.46 ccw(c6342.93,2272.93) 6342.93,2285 ccw(c6342.93,2297.07) v1@6351.46,2288.54
  Bottom Layer w10: U1.29@5776.42,764.53 5924.53,764.53 5950,790 7701.72,790 7955,1043.28 7955,2316.72 7731.72,2540 6475,2540 6382,2447 H4.12@6382,2369 6382,2312 v1(6355,2285) ; H4'.12@5947.05,2336.05 cw(c5935.1,2324.1) 5952,2324.1 cw(c5968.9,2324.1) H4'.12@5956.95,2336.05 ; H4'.12@5952,2369 5952,2318 5985,2285 v1(6260,2285) ; H4.12@6377.05,2336.05 cw(c6365.1,2324.1) 6382,2324.1 cw(c6398.9,2324.1) H4.12@6386.95,2336.05 ; H4.12@6377.05,2401.95 ccw(c6365.1,2413.9) 6382,2413.9 ccw(c6398.9,2413.9) H4.12@6386.95,2401.95
595.STCP5: H5'.12 H5.12 U1.26 | length 4792.3
  Bottom Layer w10: U1.26@5776.42,823.58 5858.58,823.58 5900,865 7691.86,865 7895,1068.14 7895,2291.86 7706.86,2480 7440,2480 7417,2457 H5.12@7417,2369 7417,2302 7360,2245 7040,2245 6982,2303 H5'.12@6982,2369 ; H5'.12@6977.05,2336.05 cw(c6965.1,2324.1) 6982,2324.1 cw(c6998.9,2324.1) H5'.12@6986.95,2336.05 ; H5.12@7412.05,2336.05 cw(c7400.1,2324.1) 7417,2324.1 cw(c7433.9,2324.1) H5.12@7421.95,2336.05 ; H5.12@7412.05,2401.95 ccw(c7400.1,2413.9) 7417,2413.9 ccw(c7433.9,2413.9) H5.12@7421.95,2401.95
1302.CLK: DS1302.7 U1.31 | length 1467
  Bottom Layer w10: U1.31@5776.42,725.16 6964.84,725.16 7090,600 DS1302.7@7165,600 ; DS1302.7@7132.05,595.05 ccw(c7120.1,583.1) 7120.1,600 ccw(c7120.1,616.9) DS1302.7@7132.05,604.95
1302.DATA: DS1302.6 U1.32 | length 1479.4
  Bottom Layer w10: U1.32@5776.42,705.47 6940,705.47 ; 6940,705.16 6944.84,705.16 7100,550 DS1302.6@7165,550 ; DS1302.6@7132.05,545.05 ccw(c7120.1,533.1) 7120.1,550 ccw(c7120.1,566.9) DS1302.6@7132.05,554.95
1302.RST: DS1302.5 U1.33 | length 1492.1
  Bottom Layer w10: U1.33@5776.42,685.79 6913.58,685.79 7099.37,500 DS1302.5@7165,500 ; DS1302.5@7132.05,495.05 ccw(c7120.1,483.1) 7120.1,500 ccw(c7120.1,516.9) DS1302.5@7132.05,504.95
+3.3V: BEEP.1 C21.2 C22.2 C23.2 C24.2 C34.1 C35.2 C40.2 DS1302.1 R20.1 R150.1 REMOTE.3 U1.9 U1.24 U1.36 U1.48 U3.2 U3.4 | length 9691.4
  Top Layer w10: v1@5835,1004.37 v1(5835.63,1005)
  Top Layer w20: v1(5360,455.63) 5866.26,455.63 v1(5965.63,555) ; v1@5835,1004.37 5835,890 5910,815 5910,610.63 v1(5965.63,555) ; v1(7315,625) 7315,520 7280,485 5975,485 5965.63,494.37 v1(5965.63,555)
  Bottom Layer w10: R20.1@4970,819.37 4975.63,825 5265,825 5305.79,784.21 U1.9@5453.58,784.21 ; R20.1@4980.85,810.49 cw(c5015.88,775.46) 5015.88,825 ; R20.1@4987.92,803.42 cw(c5040.02,751.32) 5040.02,825 ; R20.1@4987.92,835.32 ccw(c5012.84,860.24) 5012.84,825 ; v1(5360,455.63) 5440.63,455.63 5506.73,521.73 U1.48@5506.73,573.58 ; C23.2@5363.54,452.09 cw(c5372.07,443.56) 5372.07,455.63 cw(c5372.07,467.7) C23.2@5363.54,459.17 ; C23.2@5370.85,446.75 cw(c5392.29,425.31) 5392.29,455.63 cw(c5392.29,485.95) C23.2@5370.85,464.51 ; C23.2@5377.92,439.68 cw(c5416.43,401.17) 5416.43,455.63 cw(c5416.43,510.09) C23.2@5377.92,471.58 ; U1.24@5723.27,896.42 5723.27,978.27 5750,1005 v1(5835.63,1005) ; U1.36@5776.42,626.73 5948.27,626.73 5965.63,609.37 ; C22.2@5819.68,989.05 ccw(c5781.17,950.54) 5781.17,1005 ccw(c5781.17,1059.46) C22.2@5819.68,1020.95 ; C22.2@5826.75,996.12 ccw(c5805.31,974.68) 5805.31,1005 ccw(c5805.31,1035.32) C22.2@5826.75,1013.88 ; C22.2@5832.09,1001.46 ccw(c5823.56,992.93) 5823.56,1005 ccw(c5823.56,1017.07) C22.2@5832.09,1008.54 ; C21.2@5950.13,573.36 ccw(c5916.05,609.37) 5965.63,609.37 ; C21.2@5957,566.09 ccw(c5938.03,586.14) 5965.63,586.14 ccw(c5993.23,586.14) C21.2@5974.26,566.09 ; C21.2@5962.09,558.54 ccw(c5953.56,567.07) 5965.63,567.07 ccw(c5977.7,567.07) C21.2@5969.17,558.54 ; v1(5965.63,555) 5965.63,609.37 ; C21.2@5981.13,573.36 cw(c6015.21,609.37) 5965.63,609.37
  Bottom Layer w20: REMOTE.3@4251.19,588.81 ccw(c4219.38,620.62) 4264.37,620.62 ; C40.2@4251.95,745.62 cw(c4221.98,715.64) 4264.37,715.64 cw(c4306.76,715.64) C40.2@4276.79,745.62 ; REMOTE.3@4264.37,575.63 C40.2@4264.37,760 R150.1@4385.63,760 ; 4264.37,623.66 ccw(c4313.66,623.66) REMOTE.3@4278.81,588.81 ; C40.2@4276.79,747.58 cw(c4306.76,717.61) 4306.76,760 cw(c4306.76,802.39) C40.2@4276.79,772.42 ; R150.1@4373.21,747.58 ccw(c4343.24,717.61) 4343.24,760 ccw(c4343.24,802.39) R150.1@4373.21,772.42 ; R150.1@4373.21,774.38 ccw(c4343.24,804.36) 4385.63,804.36 ccw(c4428.02,804.36) R150.1@4398.05,774.38 ; R150.1@4385.63,780 4385.63,825.63 4405,845 4570,845 4595.63,819.37 C24.2@4645,819.37 R20.1@4970,819.37 ; C24.2@4630.62,806.95 ccw(c4600.64,776.98) 4600.64,819.37 ccw(c4600.64,861.76) C24.2@4630.62,831.79 ; C24.2@4659.38,806.95 cw(c4689.36,776.98) 4689.36,819.37 cw(c4689.36,861.76) C24.2@4659.38,831.79 ; R20.1@4955.62,806.95 ccw(c4925.64,776.98) 4925.64,819.37 ccw(c4925.64,861.76) R20.1@4955.62,831.79 ; 7324.56,634.56 cw(c7357,602.13) DS1302.1@7357,648 ; 7325.22,635.09 ccw(c7332.29,617.7) v1(7315,625) 7340,650 DS1302.1@7385,650
  Bottom Layer w30: U3.2@2394.35,574.37 U3.2@2394.83,574.85 U3.4@2631.05,574.85 3139.85,574.85 BEEP.1@3140,575 ; U3.4@2613.82,557.62 ccw(c2572.22,516.02) 2572.22,574.85 ccw(c2572.22,633.69) U3.4@2613.82,592.08 ; U3.4@2648.28,557.62 cw(c2689.89,516.02) 2689.89,574.85 cw(c2689.89,633.69) U3.4@2648.28,592.08 ; 2706.55,574.85 cw(c2706.55,542.89) C35.2@2729.15,565.49 ; 2708.87,574.85 ccw(c2708.87,603.53) C35.2@2729.15,583.25 ; C35.2@2750.85,565.49 cw(c2773.45,542.89) 2773.45,574.85 ; C35.2@2750.85,583.25 ccw(c2771.13,603.53) 2771.13,574.85 ; 2797.33,574.85 cw(c2797.33,512.13) C34.1@2841.68,556.48 ; 2809.54,574.85 ccw(c2809.54,620.3) C34.1@2841.68,588.16 ; C34.1@2888.32,556.48 cw(c2932.67,512.13) 2932.67,574.85 ; C34.1@2888.32,588.16 ccw(c2920.46,620.3) 2920.46,574.85 ; BEEP.1@3140,574.85 4130,574.85 ; 4130.15,575 REMOTE.3@4265,575 4385,455 C23.2@5360,455 ; REMOTE.3@4254.73,564.73 ccw(c4229.93,539.93) 4229.93,575 ccw(c4229.93,610.07) REMOTE.3@4254.73,585.27 ; REMOTE.3@4265,560.47 cw(c4265,525.4) 4289.8,550.2 cw(c4314.6,575) REMOTE.3@4279.53,575 ; 5326.19,455 ccw(c5326.19,487.47) C23.2@5349.15,464.51 ; 5329.23,455 cw(c5329.23,426.83) C23.2@5349.15,446.75
+5.0V: C32.1 C33.2 H0'.10 H0'.16 H0.10 H0.16 H1'.10 H1'.16 H1.10 H1.16 H2'.10 H2'.16 H2.10 H2.16 H3'.10 H3'.16 H3.10 H3.16 H4'.10 H4'.16 H4.10 H4.16 H5'.10 H5'.16 H5.10 H5.16 U2.1 U3.3 | length 21253.1
  Top Layer w20: v3(1057,2485) 1057,2582.61 ; v3(1355,2500) 1355,2582.61 ; v3(1490,2500) 1490,2582.61 ; v3(1785,2470) 1785,2582.61 ; 2115,2582.61 2117,2580.61 v3(2117,2460) ; v3(2415,2450) 2415,2582.61 ; v3(2545,2455) 2545,2582.61 ; v3(2905,2410) 2905,2582.61 ; v3(3440,2470) 3440,2582.61 ; v3(3735,2500) 3735,2582.61 ; 3860,2582.61 3862,2580.61 v3(3862,2498) ; v3(4160,2455) 4160,2577.61 4165,2582.61 ; v1(4482,2455) 4482,2579.61 4485,2582.61 ; v3(4780,2475) 4780,2582.61 ; v3(4948,2468) 4948,2580.61 4950,2582.61 ; v3(5325,2400) 5325,2582.61 ; v3(5850,2485) 5850,2582.61 ; v3(6153,2498) 6153,2580.61 6155,2582.61 ; v3(6280,2500) 6280,2582.61 ; v3(6580,2470) 6580,2582.61 ; v3(6880,2455) 6880,2582.61 ; v3(7180,2470) 7180,2582.61 ; v3(7315,2460) 7315,2582.61 ; v3(7670,2400) 7670,2582.61
  Top Layer w40: 1057,2582.61 1355,2582.61 1490,2582.61 1785,2582.61 2115,2582.61 2415,2582.61 2545,2582.61 2905,2582.61 3440,2582.61 3735,2582.61 3860,2582.61 4165,2582.61 4485,2582.61 4780,2582.61 4950,2582.61 5325,2582.61 5850,2582.61 6155,2582.61 6280,2582.61 6580,2582.61 6880,2582.61 7180,2582.61 7315,2582.61 7670,2582.61 7802.39,2582.61 8050,2335 8050,655 7725,330 2450,330 2290,490 v5(2290,665)
  Bottom Layer w20: H0'.10@1057,2364 v3(1057,2485) ; v3@1351.46,2496.46 cw(c1338.1,2483.1) 1357,2483.1 ; v3(1355,2500) 1357,2498 H0'.16@1357,2364 ; H0.10@1485.59,2393.41 ccw(c1474.93,2404.07) 1490,2404.07 ; H0.10@1487,2364 1490,2367 v3(1490,2500) ; v3(1785,2470) H0.16@1787,2364 ; H1'.10@2117,2364 v3(2117,2460) ; v3@2411.46,2446.46 cw(c2398.1,2433.1) 2417,2433.1 ; v3(2415,2450) 2417,2448 H1'.16@2417,2364 ; v3@2541.46,2451.46 cw(c2528.1,2438.1) 2547,2438.1 ; v3(2545,2455) 2547,2453 H1.10@2547,2364 ; H1.16@2847,2364 2884,2364 ; v3@2900.03,2409.46 cw(c2844.53,2403.47) 2884,2364 ; v3(2905,2410) 2905,2385 2884,2364 ; 2913.54,2393.54 ccw(c2897.86,2409.23) 2919.91,2411.61 ; H2'.10@3437,2364 3437,2467 v3(3440,2470) ; 3437,2450.69 cw(c3459.31,2450.69) v3@3443.54,2466.46 ; v3@3731.46,2496.46 cw(c3718.1,2483.1) 3737,2483.1 ; v3(3735,2500) 3737,2498 H2'.16@3737,2364 ; H2.10@3862,2364 v3(3862,2498) ; v3@4156.46,2451.46 cw(c4143.1,2438.1) 4162,2438.1 ; v3(4160,2455) 4162,2453 H2.16@4162,2364 ; H3'.10@4482,2369 v1(4482,2455) ; v3@4776.46,2471.46 cw(c4763.1,2458.1) 4782,2458.1 ; v3(4780,2475) 4782,2473 H3'.16@4782,2369 ; H3.10@4947,2369 4947,2468 v3(4948,2468) ; H3.16@5247,2369 5294,2369 v3(5325,2400) ; v3@5846.46,2481.46 cw(c5833.1,2468.1) 5852,2468.1 ; v3(5850,2485) 5852,2483 H4'.10@5852,2369 ; H4'.16@6152,2369 6152,2498 v3(6153,2498) ; v3@6276.46,2496.46 cw(c6263.1,2483.1) 6282,2483.1 ; v3(6280,2500) 6282,2498 H4.10@6282,2369 ; v3@6576.46,2466.46 cw(c6563.1,2453.1) 6582,2453.1 ; v3(6580,2470) 6582,2468 H4.16@6582,2369 ; v3@6876.46,2451.46 cw(c6863.1,2438.1) 6882,2438.1 ; v3(6880,2455) 6882,2453 H5'.10@6882,2369 ; v3@7176.46,2466.46 cw(c7163.1,2453.1) 7182,2453.1 ; v3(7180,2470) 7182,2468 H5'.16@7182,2369 ; v3@7311.46,2456.46 cw(c7298.1,2443.1) 7317,2443.1 ; v3(7315,2460) 7317,2458 H5.10@7317,2369 ; H5.16@7617,2369 7639,2369 v3(7670,2400)
  Bottom Layer w40: U2.1@1974.76,802.17 2181.54,802.17 C33.2@2190,810.63 C32.1@2190,667.32 ; 2149.35,802.17 ccw(c2149.35,849.31) C33.2@2182.69,815.97 ; C32.1@2185,667.32 C32.1@2190,667.32 ; 2190,715.32 ccw(c2240.48,715.32) 2204.79,679.63 ccw(c2234.49,709.33) 2234.49,667.32 ccw(c2234.49,625.31) C32.1@2204.79,655.02 ; v5(2290,665) 2287.68,667.32 C32.1@2190,667.32 ; v5@2290,667.32 2392.81,667.32 U3.3@2394.83,669.34
+12V: C30.1 C31.2 L0.2 SW.2 U0.1 U0.6 U0.7 U0.8 U2.3 | length 2563.7
  Bottom Layer w40: SW.2@645,1595 775,1595 800,1570 800,1220.35 950,1070.35 950,930 1005,875 ; SW.2@688.22,1581.3 cw(c721.29,1548.24) 721.29,1595 cw(c721.29,1641.76) SW.2@688.22,1608.7 ; L0.2@772.27,1267.76 ccw(c705.32,1334.71) 800,1334.71 ; L0.2@799.89,1161.72 cw(c799.89,1019.91) 900.16,1120.19 ; 800,1334.16 ccw(c893.89,1334.16) L0.2@827.5,1267.76 ; L0.2@838.94,1200.78 ccw(c885.7,1200.78) L0.2@852.64,1167.71 ; 1010,875 1155,875 ; U0.1@1170,875 U0.8@1170,655 U0.7@1220,655 ; U0.6@1270,655 U0.7@1220,655 ; C31.2@1450,800 1300,800 1220,720 U0.7@1220,655 ; C31.2@1471.69,802.32 C30.1@1645,802.32 1795.08,802.32 U2.3@1795.24,802.17 ; C30.1@1625.21,790.02 ccw(c1595.51,760.31) 1595.51,802.32 ccw(c1595.51,844.33) C30.1@1625.21,814.63 ; C30.1@1664.79,790.02 cw(c1694.49,760.31) 1694.49,802.32 cw(c1694.49,844.33) C30.1@1664.79,814.63
+170V: C10.1 D0.2 Neon0.1 Neon1.1 Neon2.1 Neon3.1 R13.2 R130.2 R131.2 R132.2 R133.2 R134.2 R135.2 | length 11404.2
  Top Layer w40: R130.2@1510,1875.63 1510,1990 ; 3070,1990 3070,1545 ; Neon0.1@3110,1365 3070,1405 3070,1545 ; Neon1.1@3110,1505 3070,1545 ; R132.2@3910,1875.63 3910,1990 ; R133.2@4935,1875.63 4935,1990 ; 5500,1427.43 cw(c5601.67,1427.43) Neon3.1@5529.78,1499.32 ; 5500,1442.57 ccw(c5601.67,1442.57) Neon2.1@5529.78,1370.68 ; 5500,1582.57 ccw(c5601.67,1582.57) Neon3.1@5529.78,1510.68 ; 5500,1990 5500,1535 ; Neon2.1@5530,1365 5500,1395 5500,1535 ; Neon3.1@5530,1505 5500,1535 ; R134.2@6315,1875.63 6315,1990 ; R135.2@7330,1875.63 7330,1975
  Top Layer w60: C10.1@550,600 550,960 860,1270 860,1905 945,1990 1510,1990 2525,1990 ; R131.2@2525,1879.37 2525,1990 ; 7330,1975 7315,1990 6315,1990 5500,1990 4935,1990 3910,1990 3070,1990 2525,1990
  Bottom Layer w60: D0.2@515,930 500,915 500,650 C10.1@550,600 730,420 1115,420 1150,455 R13.2@1150,465.63 ; 1043.76,420 ccw(c1043.76,569.9) R13.2@1149.76,463.9
BEEP: R160.1 U1.45 | length 2231.3
  Top Layer w10: v1@3875,700 cw(c3875,687.93) 3883.54,696.46 cw(c3892.07,705) v1@3880,705 ; v1(3875,705) 3925,655 4515.27,655 5440,655 5480,695 v1(5610,695) ; v1@5606.46,691.46 ccw(c5597.93,682.93) 5597.93,695 ccw(c5597.93,707.07) v1@5606.46,698.54
  Bottom Layer w10: R160.1@3765,705.63 3765.63,705 v1(3875,705) ; R160.1@3775.85,696.75 cw(c3795.77,676.83) 3795.77,705 ; R160.1@3775.85,714.51 ccw(c3798.81,737.47) 3798.81,705 ; R160.1@3782.92,689.68 cw(c3819.91,652.69) 3819.91,705 ; R160.1@3782.92,721.58 ccw(c3822.95,761.61) 3822.95,705 ; v1@3871.46,701.46 ccw(c3862.93,692.93) 3862.93,705 ccw(c3862.93,717.07) v1@3871.46,708.54 ; U1.45@5565.79,573.58 5565.79,630.79 5610,675 v1(5610,695) ; v1@5606.46,691.46 cw(c5597.93,682.93) 5610,682.93 cw(c5622.07,682.93) v1@5613.54,691.46
BREATHCMD: LED0.4 LED0.5 LED0.6 LED1.4 LED1.5 LED1.6 LED2.4 LED2.5 LED2.6 LED3.4 LED3.5 LED3.6 LED4.4 LED4.5 LED4.6 LED5.4 LED5.5 LED5.6 Q2.1 | length 9443.7
  Top Layer w10: LED0.4@1504.62,1430.38 ccw(c1479.55,1455.45) 1515,1455.45 ccw(c1550.45,1455.45) LED0.4@1525.38,1430.38 ; LED0.5@1504.62,1477.12 cw(c1479.55,1452.05) 1515,1452.05 cw(c1550.45,1452.05) LED0.5@1525.38,1477.12 ; LED0.5@1504.62,1497.88 ccw(c1479.55,1522.95) 1515,1522.95 ccw(c1550.45,1522.95) LED0.5@1525.38,1497.88 ; LED0.6@1504.62,1544.62 cw(c1479.55,1519.55) 1515,1519.55 cw(c1550.45,1519.55) LED0.6@1525.38,1544.62 ; LED0.6@1515,1555 LED0.5@1515,1487.5 LED0.4@1515,1420 1543.64,1420 1643.64,1320 1715,1320 1805,1230 2080,1230 2190,1340 2240,1340 2260,1360 2410,1360 2475,1425 LED1.4@2535,1425 ; LED0.4@1534.69,1405.32 cw(c1534.69,1348.24) 1575.04,1388.6 ; LED0.4@1534.69,1415.32 cw(c1534.69,1382.39) 1557.97,1405.67 ; LED0.4@1549.37,1420 ccw(c1563.2,1420) LED0.4@1553.42,1410.22 ; LED1.4@2504.93,1414.62 ccw(c2479.86,1389.55) 2479.86,1425 ccw(c2479.86,1460.45) LED1.4@2504.93,1435.38 ; LED1.4@2524.62,1435.38 ccw(c2499.55,1460.45) 2535,1460.45 ccw(c2570.45,1460.45) LED1.4@2545.38,1435.38 ; LED1.5@2524.62,1482.12 cw(c2499.55,1457.05) 2535,1457.05 cw(c2570.45,1457.05) LED1.5@2545.38,1482.12 ; LED1.5@2524.62,1502.88 ccw(c2499.55,1527.95) 2535,1527.95 ccw(c2570.45,1527.95) LED1.5@2545.38,1502.88 ; LED1.6@2524.62,1549.62 cw(c2499.55,1524.55) 2535,1524.55 cw(c2570.45,1524.55) LED1.6@2545.38,1549.62 ; LED1.6@2535,1560 LED1.5@2535,1492.5 LED1.4@2535,1425 ; LED1.4@2554.69,1410.32 cw(c2554.69,1347.31) 2599.24,1391.86 ; LED1.4@2554.69,1420.32 cw(c2554.69,1381.45) 2582.17,1408.93 ; LED2.4@3914.93,1414.62 ccw(c3889.86,1389.55) 3889.86,1425 ccw(c3889.86,1460.45) LED2.4@3914.93,1435.38 ; LED2.4@3934.62,1435.38 ccw(c3909.55,1460.45) 3945,1460.45 ccw(c3980.45,1460.45) LED2.4@3955.38,1435.38 ; LED2.5@3934.62,1482.12 cw(c3909.55,1457.05) 3945,1457.05 cw(c3980.45,1457.05) LED2.5@3955.38,1482.12 ; LED2.5@3934.62,1502.88 ccw(c3909.55,1527.95) 3945,1527.95 ccw(c3980.45,1527.95) LED2.5@3955.38,1502.88 ; LED2.6@3934.62,1549.62 cw(c3909.55,1524.55) 3945,1524.55 cw(c3980.45,1524.55) LED2.6@3955.38,1549.62 ; LED2.6@3945,1560 LED2.5@3945,1492.5 LED2.4@3945,1425 ; LED2.4@3964.69,1410.32 cw(c3964.69,1386.17) 3981.76,1403.24 ; LED2.4@3979.37,1425 ccw(c4026.13,1425) 3993.07,1391.93 ; LED3.4@4929.9,1419.65 ccw(c4905,1394.88) 4905,1430 ; LED3.4@4929.9,1440.35 cw(c4905,1465.12) 4905,1430 ; LED3.4@4949.62,1440.38 ccw(c4924.55,1465.45) 4960,1465.45 ccw(c4995.45,1465.45) LED3.4@4970.38,1440.38 ; LED3.5@4949.62,1487.12 cw(c4924.55,1462.05) 4960,1462.05 cw(c4995.45,1462.05) LED3.5@4970.38,1487.12 ; LED3.5@4949.62,1507.88 ccw(c4924.55,1532.95) 4960,1532.95 ccw(c4995.45,1532.95) LED3.5@4970.38,1507.88 ; LED3.6@4949.62,1554.62 cw(c4924.55,1529.55) 4960,1529.55 cw(c4995.45,1529.55) LED3.6@4970.38,1554.62 ; LED3.6@4960,1565 LED3.5@4960,1497.5 LED3.4@4960,1430 ; LED3.4@4979.69,1415.32 cw(c4979.69,1379.1) 5005.29,1404.71 ; LED3.4@4994.37,1430 ccw(c5029.06,1430) 5004.53,1405.47 ; v1@5566.46,1226.46 ccw(c5557.93,1217.93) 5557.93,1230 ccw(c5557.93,1242.07) v1@5566.46,1233.54 ; v1@5573.54,1226.46 cw(c5582.07,1217.93) 5582.07,1230 cw(c5582.07,1242.07) v1@5573.54,1233.54 ; LED4.4@6299.93,1419.62 ccw(c6274.86,1394.55) 6274.86,1430 ccw(c6274.86,1465.45) LED4.4@6299.93,1440.38 ; LED4.4@6319.62,1440.38 ccw(c6294.55,1465.45) 6330,1465.45 ccw(c6365.45,1465.45) LED4.4@6340.38,1440.38 ; LED4.5@6319.62,1487.12 cw(c6294.55,1462.05) 6330,1462.05 cw(c6365.45,1462.05) LED4.5@6340.38,1487.12 ; LED4.5@6319.62,1507.88 ccw(c6294.55,1532.95) 6330,1532.95 ccw(c6365.45,1532.95) LED4.5@6340.38,1507.88 ; LED4.6@6319.62,1554.62 cw(c6294.55,1529.55) 6330,1529.55 cw(c6365.45,1529.55) LED4.6@6340.38,1554.62 ; LED4.6@6330,1565 LED4.5@6330,1497.5 LED4.4@6330,1430 ; LED4.4@6349.69,1415.32 cw(c6349.69,1354.96) 6392.36,1397.64 ; LED4.4@6349.69,1425.32 cw(c6349.69,1389.1) 6375.29,1414.71 ; LED5.4@7319.93,1424.62 ccw(c7294.86,1399.55) 7294.86,1435 ccw(c7294.86,1470.45) LED5.4@7319.93,1445.38 ; LED5.4@7339.62,1445.38 ccw(c7314.55,1470.45) 7350,1470.45 ccw(c7385.45,1470.45) LED5.4@7360.38,1445.38 ; LED5.5@7339.62,1492.12 cw(c7314.55,1467.05) 7350,1467.05 cw(c7385.45,1467.05) LED5.5@7360.38,1492.12 ; LED5.5@7339.62,1512.88 ccw(c7314.55,1537.95) 7350,1537.95 ccw(c7385.45,1537.95) LED5.5@7360.38,1512.88 ; LED5.6@7339.62,1559.62 cw(c7314.55,1534.55) 7350,1534.55 cw(c7385.45,1534.55) LED5.6@7360.38,1559.62 ; LED5.6@7350,1570 LED5.5@7350,1502.5 LED5.4@7350,1435 7285,1435 7225,1375 7070,1375 7030,1335 6970,1335 6865,1230 6630,1230 6530,1330 6460,1330 6360,1430 LED4.4@6330,1430 ; LED1.4@2535,1425 2566.1,1425 2681.1,1310 2740,1310 2815,1235 3450,1235 3560,1345 3615,1345 3635,1365 3800,1365 3860,1425 LED2.4@3945,1425 ; LED2.4@3945,1425 3960,1425 4095,1290 4175,1290 4215,1250 4495,1250 4585,1340 4645,1340 4675,1370 4845,1370 4905,1430 ; 4905,1430 LED3.4@4960,1430 ; LED3.4@4960,1430 4980,1430 5125,1285 5195,1285 5250,1230 v1(5570,1230) 5835,1230 5965,1360 6035,1360 6055,1380 6220,1380 6270,1430 LED4.4@6330,1430
GND: BT0.2 C10.2 C11.2 C12.1 C20.1 C21.1 C22.1 C23.1 C24.1 C25.1 C26.1 C30.2 C31.1 C32.2 C33.1 C34.2 C35.1 C40.1 C60.2 C61.2 DS1302.4 H0'.8 H0'.13 H0.8 H0.13 H1'.8 H1'.13 H1.8 H1.13 H2'.8 H2'.13 H2.8 H2.13 H3'.8 H3'.13 H3.8 H3.13 H4'.8 H4'.13 H4.8 H4.13 H5'.8 H5'.13 H5.8 H5.13 J1.2 Q00.3 Q01.3 Q1.3 Q2.3 Q02.3 Q03.3 Q04.3 Q05.3 Q06.3 Q07.3 Q08.3 Q09.3 Q10.3 Q11.3 Q12.3 Q13.3 Q14.3 Q15.3 Q16.3 Q17.3 Q18.3 Q19.3 Q20.3 Q21.3 Q22.3 Q23.3 Q24.3 Q25.3 Q26.3 Q27.3 Q28.3 Q29.3 Q30.3 Q31.3 Q32.3 Q33.3 Q34.3 Q35.3 Q36.3 Q37.3 Q38.3 Q39.3 Q40.3 Q41.3 Q42.3 Q43.3 Q44.3 Q45.3 Q46.3 Q47.3 Q48.3 Q49.3 Q50.3 Q51.3 Q52.3 Q53.3 Q54.3 Q55.3 Q56.3 Q57.3 Q58.3 Q59.3 Q.1 R10.1 R12.1 R22.2 R161.1 R170.2 R171.2 R172.2 R173.2 REMOTE.2 ST_LINK.3 SW.1 U0.4 U1.8 U1.23 U1.35 U1.47 U2.2 U3.1 | length 1552.9
  Bottom Layer w10: v1@3381.46,1701.46 cw(c3348.79,1668.79) 3395,1668.79 ; v1(3385,1705) 3395,1695 3395,1625 3413.94,1606.06 Q29.3@3427.6,1606.06 ; v1@3388.54,1708.54 cw(c3372.93,1692.93) 3395,1692.93 ; 3396.45,1623.55 ccw(c3412.39,1639.5) Q29.3@3412.39,1616.95 ; Q29.3@3402.55,1617.45 cw(c3395.24,1610.14) Q29.3@3405.58,1610.14 ; U1.8@5453.58,764.53 5529.53,764.53 v1(5555,790) 5610,790 ; U1.47@5526.42,573.58 5526.42,721.42 5545,740 v1(5570,740) 5620,740 5625,745 ; v1@5550,790 cw(c5537.93,790) 5546.46,781.46 cw(c5555,772.93) v1@5555,785 ; v1@5566.46,736.46 ccw(c5557.93,727.93) 5557.93,740 ccw(c5557.93,752.07) v1@5566.46,743.54 ; v1@5680,820 ccw(c5680,832.07) 5688.54,823.54 ccw(c5697.07,815) v1@5685,815 ; 5685,760 5680,765 v1(5680,815) 5703.58,838.58 U1.23@5703.58,896.42 ; 5700,650 5703.58,646.42 U1.35@5776.42,646.42 6173.58,646.42 6200,620 ST_LINK.3@6200,560 ; ST_LINK.3@6182.66,577.34 ccw(c6140.79,619.21) 6200,619.21 ccw(c6259.21,619.21) ST_LINK.3@6217.34,577.34 ; ST_LINK.3@6189.73,570.27 ccw(c6164.93,595.07) 6200,595.07 ccw(c6235.07,595.07) ST_LINK.3@6210.27,570.27
  other v1: 5280,515 4530,750 4580,750 5175,1055 4565,1060 3520,1485 3140,1630 3550,1650 5960,1655 5555,1710 3140,1735 3395,1815 6835,1815 3140,1845 5805,1845 2455,2060 2510,2060 6115,2060 1405,2065 6200,2065 3790,2075 7230,2075 4850,2090 1640,2235 1050,2245 2120,2245 3435,2245 4020,2245 5830,2250 6850,2250 4455,2255 6430,2260 7465,2260 2735,2270 5105,2275 3160,2370 3040,2380 5425,2390 5525,2390 2265,2440 4630,2445 6440,2445 7035,2450 4015,2455 3600,2470 6005,2470 1205,2480
H0.0: Q00.2 R48.2
  other v2: 1077.16,1727.16
H0.1: Q01.2 R47.1
  other v2: 1735.7,1783.59
H0.2: Q02.2 R40.2
  other v2: 1832.4,1601.06
H0.3: Q03.2 R41.2
  other v2: 1826.76,1401.19
H0.4: Q04.2 R42.2
  other v2: 1733.59,1219.3
H0.5: Q05.2 R43.2
  other v2: 1566.06,1107.6
H0.6: Q06.2 R44.2
  other v2: 1361.19,1088.24
H0.7: Q07.2 R45.2
  other v2: 1169.3,1166.41
H0.8: Q08.2 R46.2
  other v2: 1047.6,1323.94
H0.9: Q09.2 R54.1
  other v2: 1003.24,1538.81
H1.0: Q10.2 R63.2
  other v2: 2101.41,1730.7
H1.1: Q11.2 R62.1
  other v2: 2755.7,1778.59
H1.2: Q12.2 R55.2
  other v2: 2847.4,1606.06
H1.3: Q13.2 R56.2
  other v2: 2851.76,1396.19
H1.4: Q14.2 R57.2
  other v2: 2758.59,1214.3
H1.5: Q15.2 R58.2
  other v2: 2591.06,1097.6
H1.6: Q16.2 R59.2
  other v2: 2386.19,1078.24
H1.7: Q17.2 R60.2
  other v2: 2194.3,1156.41
H1.8: Q18.2 R61.2
  other v2: 2072.6,1318.94
H1.9: Q19.2 R69.1
  other v2: 2028.24,1533.81
H2.0: Q20.2 R78.2
  other v2: 3491.41,1725.7
H2.1: Q21.2 R77.1
  other v2: 4130.7,1788.59
H2.2: Q22.2 R70.2
  other v2: 4227.4,1616.06
H2.3: Q23.2 R71.2
  other v2: 4236.76,1411.19
H2.4: Q24.2 R72.2
  other v2: 4138.59,1224.3
H2.5: Q25.2 R73.2
  other v2: 3971.06,1107.6
H2.6: Q26.2 R74.2
  other v2: 3766.19,1088.24
H2.7: Q27.2 R75.2
  other v2: 3564.3,1161.41
H2.8: Q28.2 R76.2
  other v2: 3437.6,1313.94
H2.9: Q29.2 R82.1
  other v2: 3408.24,1533.81
H3.0: Q30.2 R91.2
  other v2: 4502.16,1737.16
H3.1: Q31.2 R90.1
  other v2: 5157.16,1782.84
H3.2: Q32.2 R83.2
  other v2: 5259.81,1613.03
H3.3: Q33.2 R84.2
  other v2: 5265.19,1398.03
H3.4: Q34.2 R85.2
  other v2: 5167.84,1222.84
H3.5: Q35.2 R86.2
  other v2: 5008.03,1110.19
H3.6: Q36.2 R87.2
  other v2: 4798.03,1084.81
H3.7: Q37.2 R88.2
  other v2: 4592.84,1162.16
H3.8: Q38.2 R89.2
  other v2: 4480.19,1316.97
H3.9: Q39.2 R97.1
  other v2: 4439.81,1541.97
H4.0: Q40.2 R106.2
  other v2: 5877.16,1752.16
H4.1: Q41.2 R105.1
  other v2: 6532.16,1787.84
H4.2: Q42.2 R98.2
  other v2: 6629.81,1618.03
H4.3: Q43.2 R99.2
  other v2: 6635.19,1418.03
H4.4: Q44.2 R100.2
  other v2: 6542.84,1237.84
H4.5: Q45.2 R101.2
  other v2: 6378.03,1120.19
H4.6: Q46.2 R102.2
  other v2: 6163.03,1094.81
H4.7: Q47.2 R103.2
  other v2: 5977.84,1177.16
H4.8: Q48.2 R104.2
  other v2: 5845.19,1336.97
H4.9: Q49.2 R110.1
  other v2: 5809.81,1556.97